# Altium PCB AIRZAI_LED_STRIP_FLEX_REVA_10mmPitch.PcbDoc
Units mil, origin at the board's own origin, x right, y up, seen from the top; angles counter-clockwise.
Board outline 6238.19 x 814.96 mil, 2 copper layers (Top Layer, Bottom Layer); 31 components, 32 nets, 158 pads, 34 vias.
Unrouted connection lines stored in the file: 53.
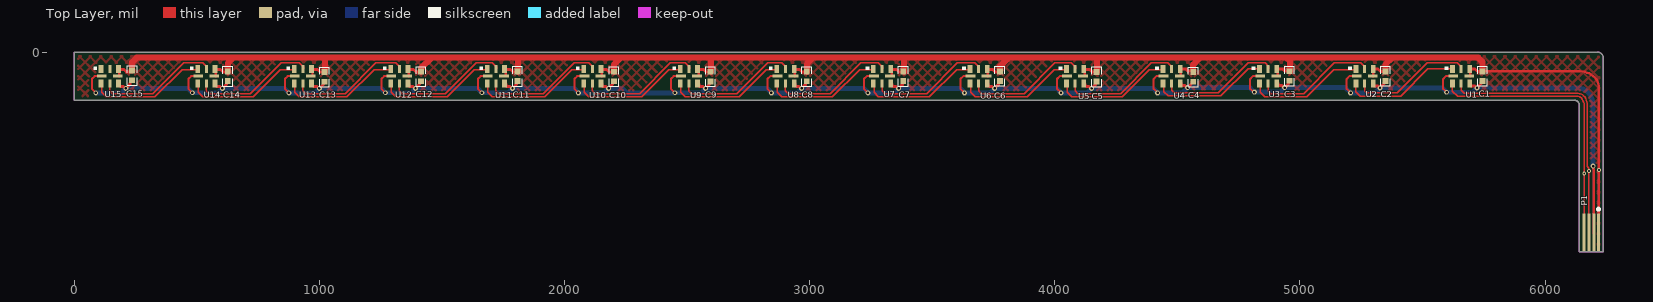
[diagram p0: Top Layer view]
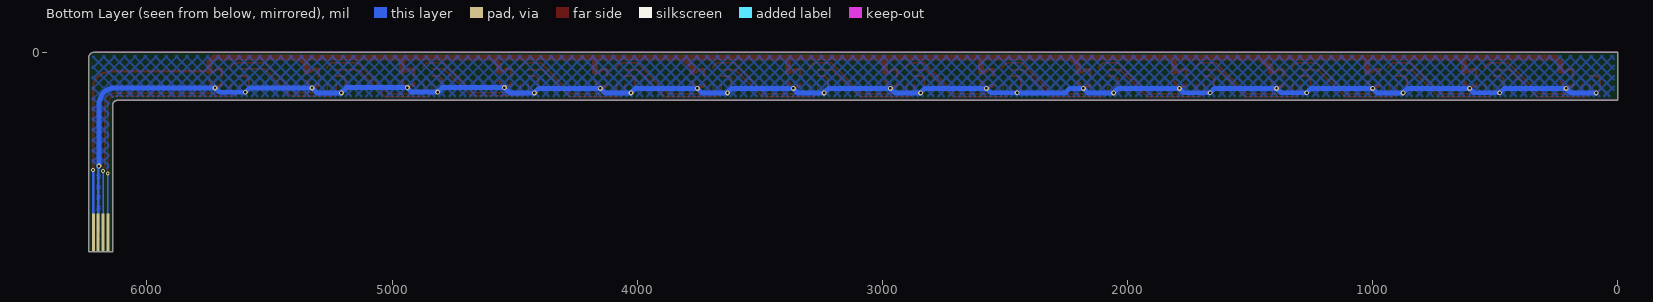
[diagram p1: Bottom Layer view, seen from below]

## Layer stack, top to bottom
Top Solder: solder mask 0.4, Solder Resist, Dk 3.5
Top Layer: signal copper 1.4
Dielectric 1: dielectric 12.6, FR-4, Dk 4.8
Bottom Layer: signal copper 1.4
Bottom Solder: solder mask 0.4, Solder Resist, Dk 3.5

## Board outline
0,-196.85 0,0 6213.15,0 cw(c6213.15,-25.04) 6238.19,-25.04 6238.19,-814.96 6139.76,-814.96 6139.76,-216.54 ccw(c6120.08,-216.54) 6120.08,-196.85
board region "Layer Stack Region 1": 6238.19,-554.85 6238.19,-814.96 6139.76,-814.96 6139.76,-554.85
board region "Layer Stack Region 1": 6139.76,-522.85 6139.76,-216.54 6139.39,-212.7 6136.45,-205.6 6131.01,-200.17 6123.92,-197.23 6120.08,-196.85 0,-196.85 0,0 6213.15,0 6218.13,0 6227.33,-3.81 6234.38,-10.86 6238.19,-20.06 6238.19,-25.04 6238.19,-522.85
board region "Layer Stack Region 2": 6139.76,-554.85 6139.76,-522.85 6238.19,-522.85 6238.19,-554.85

## Design rules (kind name [scope] priority, off if disabled: settings)
Clearance Clearance_polygon_5V [OnLayer('Keep-Out Layer') vs (InNet('+5V') AND InPolygon)] p1: gap=10 ignorepadtopadclearanceinfootprint=FALSE
Clearance Clearance_POLYGON_KEEPOUT [(OnLayer('Keep-Out Layer')) vs (InNet('GND') AND InPolygon)] p2: gap=10 ignorepadtopadclearanceinfootprint=FALSE
Clearance [All] p3: gap=6 ignorepadtopadclearanceinfootprint=FALSE
MinimumSolderMaskSliver [All] p1: minsoldermaskwidth=1
PolygonConnect [All] p1: connectstyle=Direct reliefconductorwidth=10 reliefentries=4 polygonreliefangle="90 Angle" airgapwidth=10
RoomDefinition AIRZAI_LED_STRIP_FLEX_REVA_10mmPitch [InComponentClass('AIRZAI_LED_STRIP_FLEX_REVA_10mmPitch')] p1: confinementstyle=ConfineIn formatcopy=TRUE lockcomponents=FALSE outline -4184.14,-5323.29 10475.86,-5323.29 10475.86,4276.71 -4184.14,4276.71
RoutingVias [All] p1: holewidth=28 width=50 viastyle="Through Hole" minholewidth=8 minwidth=16 maxholewidth=28 maxwidth=50
SilkToSilkClearance [All] p1: silktosilkclearance=1
SilkToSolderMaskClearance [IsPad] p1: minsilkscreentomaskgap=2 clearancetoexposedcopper=TRUE
SolderMaskExpansion [All] p1: expansion=4
UnRoutedNet [All] p1: checkbadconnections=TRUE
Width [All] p1: maxlimit=100 minlimit=6 preferedwidth=10
26 further rules are at their usual default settings.

## Components (designator, comment, footprint, x,y, rotation, side; value= is the part's Value field where it differs from the comment)
C1 "0.1µF" 0402CAP 5744.7,-98.42 r270 top
C2 "0.1µF" 0402CAP 5349.17,-98.42 r270 top
C3 "0.1µF" 0402CAP 4957.3,-97.74 r270 top
C4 "0.1µF" 0402CAP 4565.09,-101.43 r270 top
C5 "0.1µF" 0402CAP 4170.9,-100.74 r270 top
C6 "0.1µF" 0402CAP 3776.2,-98.42 r270 top
C7 "0.1µF" 0402CAP 3382.5,-98.74 r270 top
C8 "0.1µF" 0402CAP 2988.8,-99.39 r270 top
C9 "0.1µF" 0402CAP 2596.1,-99.92 r270 top
C10 "0.1µF" 0402CAP 2202.39,-99.74 r270 top
C11 "0.1µF" 0402CAP 1808.37,-98.74 r270 top
C12 "0.1µF" 0402CAP 1414.99,-99.24 r270 top
C13 "0.1µF" 0402CAP 1021.29,-101.43 r270 top
C14 "0.1µF" 0402CAP 627.02,-98.74 r270 top
C15 "0.1µF" 0402CAP 236.89,-95.34 r270 top
P1 "Header 4" FFC_4PADS 6188.98,-736.24 r0 top
U1 "APA102-2020-256-8" APA102–2020 5657.7,-98.42 r270 top
U2 "APA102-2020-256-8" APA102–2020 5264,-98.42 r270 top
U3 "APA102-2020-256-8" APA102–2020 4870.3,-98.43 r270 top
U4 "APA102-2020-256-8" APA102–2020 4476.6,-98.43 r270 top
U5 "APA102-2020-256-8" APA102–2020 4082.9,-98.42 r270 top
U6 "APA102-2020-256-8" APA102–2020 3689.2,-98.42 r270 top
U7 "APA102-2020-256-8" APA102–2020 3295.5,-98.42 r270 top
U8 "APA102-2020-256-8" APA102–2020 2901.8,-98.42 r270 top
U9 "APA102-2020-256-8" APA102–2020 2508.1,-98.42 r270 top
U10 "APA102-2020-256-8" APA102–2020 2114.39,-98.43 r270 top
U11 "APA102-2020-256-8" APA102–2020 1720.69,-98.42 r270 top
U12 "APA102-2020-256-8" APA102–2020 1326.99,-98.42 r270 top
U13 "APA102-2020-256-8" APA102–2020 933.29,-98.42 r270 top
U14 "APA102-2020-256-8" APA102–2020 539.59,-98.42 r270 top
U15 "APA102-2020-256-8" APA102–2020 145.89,-98.43 r270 top

## Footprints (in the part's own frame and the unit in brackets; to place one, negate y for a bottom-side part, rotate by r counter-clockwise, add the part's x,y. Pads: shape width x height; smd on the part's side, far side on the other; paste and mask are expansions set on the pad)
0402CAP [mm] "Chip Capacitor, Body 1.1x0.5mm, IPC High Density"
  rect 0.6x0.6 smd: 1(-0.5,0) 2(0.5,0)
  silkscreen extent -1.02,-0.51 1.02,0.51, body extent -0.5,-0.3 0.5,0.3, height 0.19
APA102–2020 [mm]
  rect 0.8x0.5 smd: 1(-0.75,0.9) 3(-0.75,-0.9) 4(0.75,-0.9) 6(0.75,0.9)
  rect 0.8x0.3 smd: 2(-0.75,0) 5(0.75,0)
  rect 0.3x1 smd: 7(0,-0.83) 8(0,0.83)
  silkscreen extent -1.02,-1.7 -0.63,-1.32, body extent -1,-1 1,1, height 0.94
FFC_4PADS [mm] "(0.50mm"
  rect 0.3x4 smd: 1(0.75,0) 2(0.25,0) 3(-0.25,0) 4(-0.75,0)
  rect 0.3x4 smd far side: 1(0.75,0) 2(0.25,0) 3(-0.25,0) 4(-0.75,0)
  silkscreen extent 0.62,2.3 0.87,2.55

## Part data
C1 C2 C3 C4 C5 C6 C7 C8 C9 C10 C11 C12 C13 C14 C15: library part C0402-100n, "Capacitor, X7R, ±10%", Case-EIA=0402, Case-Metric=1005, Manufacturer=TDK, Manufacturer Part Number=C1005X7R1C104K, Rated Voltage="16 V", Supplier Part Number 1=445-4952-2-ND, Tolerance=±20%, Max Thickness="0.6 mm", Note="16V ±10% X7R", Pin Count=2, Supplier 1=Digi-Key, Technology=SMT
P1: "Header, 4-Pin", LatestRevisionDate=17-Jul-2002, LatestRevisionNote="Re-released for DXP Platform.", Publisher="Altium Limited"
U1 U2 U3 U4 U5 U6 U7 U8 U9 U10 U11 U12 U13 U14 U15: "DotStar Micro LEDs", Package="SOIC-20 Adafruit Industries", Availability=Unavailable, MF="Adafruit Industries", MP=APA-102-2020-256-8, Price=None, SnapEDA_Link=https://www.snapeda.com/parts/APA-102-2020-256-8/APA%20Electronic%20/view-part/?ref=snap

## Via types
v1: diameter 20, hole 10, Top Layer to Bottom Layer, tented both sides, 31 vias
v2: diameter 16, hole 8, Top Layer to Bottom Layer, tented both sides, 3 vias

## Nets (pads, with @x,y where several pads share a name; then routed paths per layer and width w, separated by ;. In a path a pad name is that pad's centre, name@x,y a point inside that pad or via, vN(x,y) a via of type N, cw(c..) or ccw(c..) an arc to the next point about the centre after c; other vN are vias at no path point)
+5V: C1.1 C2.1 C3.1 C4.1 C5.1 C6.1 C7.1 C8.1 C9.1 C10.1 C11.1 C12.1 C13.1 C14.1 C15.1 P1.1 U1.1 U1.8 U2.1 U2.8 U3.1 U3.8 U4.1 U4.8 U5.1 U5.8 U6.1 U6.8 U7.1 U7.8 U8.1 U8.8 U9.1 U9.8 U10.1 U10.8 U11.1 U11.8 U12.1 U12.8 U13.1 U13.8 U14.1 U14.8 U15.1 U15.8 | length 9264
  Top Layer w10: U15.8@184.11,-98.43 U15.1@184.11,-71.21 ; U14.8@577.81,-98.42 U14.1@577.81,-71.21 ; U13.8@972.65,-96.85 U13.1@972.65,-71.21 ; U12.8@1365.27,-98.42 U12.1@1365.27,-71.2 ; U11.8@1760.05,-96.85 U11.1@1760.05,-71.21 ; U10.8@2152.67,-98.42 U10.1@2152.67,-71.21 ; U9.8@2547.45,-96.85 U9.1@2547.45,-71.21 ; U8.8@2940.07,-98.42 U8.1@2940.07,-71.21 ; U7.8@3334.85,-96.85 U7.1@3334.85,-71.21 ; U6.8@3727.48,-98.42 U6.1@3727.48,-71.21 ; U5.8@4122.25,-96.85 U5.1@4122.25,-71.21 ; U4.8@4512.12,-97.74 4513.97,-97.74 4514.88,-96.83 U4.1@4514.88,-68.21 ; U3.8@4909.66,-97.74 4910.56,-96.83 U3.1@4910.56,-68.21 ; U2.8 5298.53,-98.42 5299.43,-97.52 U2.1 ; U1.8@5694.06,-98.42 5694.97,-97.52 U1.1@5694.97,-68.9 ; C1.1 6142.14,-78.74 cw(c6142.14,-164.47) 6202.76,-103.85 cw(c6161.72,-144.89) 6219.76,-144.89 v2(6219.76,-480.85) 6218.62,-482 6218.62,-486.24 6218.5,-486.35 P1.1@6218.5,-736.24
  Top Layer w12: U15.1@184.11,-71.21 203.76,-71.21 213.6,-81.05 C15.1@233.84,-81.05 ; U14.1@577.81,-71.21 597.46,-71.21 607.3,-81.05 C14.1@627.55,-81.05 ; U13.1@972.65,-71.21 993.2,-71.21 1003.04,-81.05 C13.1@1023.29,-81.05 ; U12.1@1365.27,-71.2 1384.92,-71.2 1394.76,-81.05 C12.1@1415,-81.05 ; U11.1@1760.05,-71.21 1780.6,-71.21 1790.44,-81.05 C11.1@1810.69,-81.05 ; U10.1@2152.67,-71.21 2172.32,-71.21 2182.16,-81.05 C10.1@2202.4,-81.05 ; U9.1@2547.45,-71.21 2568,-71.21 2577.84,-81.05 C9.1@2598.09,-81.05 ; U8.1@2940.07,-71.21 2959.72,-71.21 2969.56,-81.05 C8.1@2989.81,-81.05 ; U7.1@3334.85,-71.21 3355.4,-71.21 3365.25,-81.05 C7.1@3385.49,-81.05 ; U6.1@3727.48,-71.21 3747.12,-71.21 3756.96,-81.05 C6.1@3777.21,-81.05 ; U5.1@4122.25,-71.21 4142.81,-71.21 4152.65,-81.05 C5.1@4172.89,-81.05 ; U4.1@4514.88,-68.21 4534.52,-68.21 4544.36,-78.05 C4.1@4564.61,-78.05 ; U3.1@4910.56,-68.21 4930.21,-68.21 4940.05,-78.05 C3.1@4960.29,-78.05 ; U2.1 5319.08,-68.9 5328.92,-78.74 C2.1 ; U1.1@5694.97,-68.9 5714.62,-68.9 5724.46,-78.74 C1.1
  Top Layer w25: C15.1 236.89,-41.61 255.86,-22.65 649.56,-22.65 ; C14.1@627.55,-81.05 627.55,-44.66 649.56,-22.65 ; 899.26,-22.65 1021.06,-22.65 1023.29,-24.88 C13.1@1023.29,-81.05 ; C12.1@1415,-81.05 1415,-66.85 1459.21,-22.65 ; C11.1@1810.69,-81.05 1810.69,-29.85 1803.49,-22.65 ; C10.1@2202.4,-81.05 2202.4,-50.68 2230.44,-22.65 ; C9.1@2598.09,-81.05 2598.09,-22.65 ; C8.1@2989.81,-81.05 2989.81,-46.56 3013.71,-22.65 ; C7.1@3385.49,-81.05 3385.49,-27.98 3380.16,-22.65 3298.49,-22.65 ; C6.1@3777.21,-81.05 3777.21,-57.86 3812.41,-22.65 ; C5.1@4172.89,-81.05 4172.89,-22.65 4136.06,-22.65 ; C4.1@4564.61,-78.05 4564.61,-51.08 4588.48,-27.21 ; 4944.55,-22.65 4960.29,-38.4 C3.1@4960.29,-78.05 ; C2.1 5349.17,-50.63 5376.36,-23.44 ; C1.1 5744.7,-39.09 5728.26,-22.65 4136.06,-22.65 ; 649.56,-22.65 1459.21,-22.65 ; 1459.21,-22.65 1803.49,-22.65 ; 1803.49,-22.65 2598.09,-22.65 ; 2598.09,-22.65 3298.49,-22.65 ; 3298.49,-22.65 4136.06,-22.65
  Bottom Layer w10: P1.1@6218.5,-736.24 6218.5,-486.35 6218.62,-486.24 6218.62,-482.22 6218.5,-482.11 v2(6219.76,-480.85)
GND: C1.2 C2.2 C3.2 C4.2 C5.2 C6.2 C7.2 C8.2 C9.2 C10.2 C11.2 C12.2 C13.2 C14.2 C15.2 P1.2 U1.6 U1.7 U2.6 U2.7 U3.6 U3.7 U4.6 U4.7 U5.6 U5.7 U6.6 U6.7 U7.6 U7.7 U8.6 U8.7 U9.6 U9.7 U10.6 U10.7 U11.6 U11.7 U12.6 U12.7 U13.6 U13.7 U14.6 U14.7 U15.6 U15.7 | length 9913.9
  Top Layer w8: v1(88.65,-166.16) 72.26,-149.77 72.26,-109.85 83.68,-98.43 U15.7 ; v1(482.35,-166.16) 465.96,-149.77 465.96,-109.85 477.39,-98.42 U14.7 ; v1(876.05,-166.16) 859.66,-149.77 859.66,-109.85 871.09,-98.42 U13.7 ; v1(1269.75,-166.16) 1253.36,-149.77 1253.36,-109.85 1264.79,-98.42 U12.7 ; v1(1663.45,-166.16) 1647.06,-149.77 1647.06,-109.85 1658.49,-98.42 U11.7 ; v1(2057.15,-166.16) 2040.76,-149.77 2040.76,-109.85 2052.19,-98.43 U10.7 ; v1(2450.85,-166.16) 2434.47,-149.77 2434.47,-109.85 2445.89,-98.42 U9.7 ; v1(2844.55,-166.16) 2828.17,-149.77 2828.17,-109.85 2839.59,-98.42 U8.7 ; v1(3238.25,-166.16) 3221.87,-149.77 3221.87,-109.85 3233.29,-98.42 U7.7 ; v1(3631.96,-166.16) 3615.57,-149.77 3615.57,-109.85 3626.99,-98.42 U6.7 ; v1(4025.66,-166.16) 4009.27,-149.77 4009.27,-109.85 4020.69,-98.42 U5.7 ; v1(4419.36,-166.16) 4402.97,-149.77 4402.97,-109.85 4414.39,-98.43 U4.7 ; v1@4813.06,-166.16 4796.67,-149.77 4796.67,-109.85 4808.09,-98.43 U3.7 ; v1(5206.76,-166.16) 5190.37,-149.77 5190.37,-109.85 5201.8,-98.42 U2.7 ; v1@5600.46,-166.16 5584.07,-149.77 5584.07,-109.85 5595.5,-98.42 U1.7
  Top Layer w10: v1@6197.68,-466.76 v1(6195.76,-464.85) 6195.76,-474.85 6198.82,-477.91 P1.2@6198.82,-736.24
  Top Layer w12: U15.6@184.11,-130.26 184.11,-136.17 187.95,-140.01 201.13,-140.01 209.28,-148.16 v1(211.44,-148.16) 228.03,-131.57 228.03,-126.23 C15.2@233.84,-120.42 ; U14.6@577.81,-130.26 577.81,-136.17 581.66,-140.01 594.83,-140.01 602.98,-148.16 v1(605.14,-148.16) 621.73,-131.57 621.73,-126.23 C14.2@627.55,-120.42 ; U13.6@973.55,-130.26 973.55,-136.17 977.4,-140.01 990.57,-140.01 998.72,-148.16 v1(1000.88,-148.16) 1017.47,-131.57 1017.47,-126.23 C13.2@1023.29,-120.42 ; U12.6@1365.27,-130.26 1365.27,-136.17 1369.11,-140.01 1382.29,-140.01 1390.44,-148.16 v1(1392.6,-148.16) 1409.19,-131.57 1409.19,-126.23 C12.2@1415,-120.42 ; U11.6@1760.96,-130.26 1760.96,-136.17 1764.8,-140.01 1777.97,-140.01 1786.12,-148.16 v1(1788.29,-148.16) 1804.88,-131.57 1804.88,-126.23 C11.2@1810.69,-120.42 ; U10.6@2152.67,-130.26 2152.67,-136.17 2156.51,-140.01 2169.69,-140.01 2177.84,-148.16 v1(2180,-148.16) 2196.59,-131.57 2196.59,-126.23 C10.2@2202.4,-120.42 ; U9.6@2548.36,-130.26 2548.36,-136.17 2552.2,-140.01 2565.37,-140.01 2573.52,-148.16 v1(2575.69,-148.16) 2592.28,-131.57 2592.28,-126.23 C9.2@2598.09,-120.42 ; U8.6@2940.07,-130.26 2940.07,-136.17 2943.92,-140.01 2957.09,-140.01 2965.24,-148.16 v1(2967.4,-148.16) 2983.99,-131.57 2983.99,-126.23 C8.2@2989.81,-120.42 ; U7.6@3335.76,-130.26 3335.76,-136.17 3339.6,-140.01 3352.77,-140.01 3360.92,-148.16 v1(3363.09,-148.16) 3379.68,-131.57 3379.68,-126.23 C7.2@3385.49,-120.42 ; U6.6@3727.48,-130.26 3727.48,-136.17 3731.32,-140.01 3744.49,-140.01 3752.64,-148.16 v1(3754.81,-148.16) 3771.4,-131.57 3771.4,-126.23 C6.2@3777.21,-120.42 ; U5.6@4123.16,-130.26 4123.16,-136.17 4127,-140.01 4140.18,-140.01 4148.33,-148.16 v1(4150.49,-148.16) 4167.08,-131.57 4167.08,-126.23 C5.2@4172.89,-120.42 ; U4.6@4514.88,-127.26 4514.88,-133.17 4518.72,-137.01 4531.89,-137.01 4540.04,-145.16 v1(4542.21,-145.16) 4558.8,-128.57 4558.8,-123.23 C4.2@4564.61,-117.42 ; U3.6@4910.56,-127.26 4910.56,-133.17 4914.4,-137.01 4927.58,-137.01 4935.73,-145.16 v1(4937.89,-145.16) 4954.48,-128.57 4954.48,-123.23 C3.2@4960.29,-117.42 ; U2.6 5299.43,-133.86 5303.28,-137.7 5316.45,-137.7 5324.6,-145.85 v1(5326.76,-145.85) 5343.36,-129.26 5343.36,-123.92 C2.2 ; U1.6@5694.97,-127.95 5694.97,-133.86 5698.81,-137.7 5711.99,-137.7 5720.14,-145.85 v1(5722.3,-145.85) 5738.89,-129.26 5738.89,-123.92 C1.2
  Bottom Layer w10: P1.2@6198.82,-736.24 6198.82,-474.98
  Bottom Layer w20: v1(88.65,-166.16) 193.44,-166.16 v1(211.44,-148.16) 425.76,-148.16 464.35,-148.16 v1(482.35,-166.16) 587.14,-166.16 v1(605.14,-148.16) 858.05,-148.16 v1(876.05,-166.16) 982.88,-166.16 v1(1000.88,-148.16) 1251.75,-148.16 v1(1269.75,-166.16) 1374.6,-166.16 v1(1392.6,-148.16) 1645.45,-148.16 v1(1663.45,-166.16) 1770.29,-166.16 v1(1788.29,-148.16) 2039.15,-148.16 v1(2057.15,-166.16) 2162,-166.16 v1(2180,-148.16) 2236,-148.16 2254,-166.16 v1(2450.85,-166.16) 2557.69,-166.16 v1(2575.69,-148.16) 2826.55,-148.16 v1(2844.55,-166.16) 2949.4,-166.16 v1(2967.4,-148.16) 3220.25,-148.16 v1(3238.25,-166.16) 3345.09,-166.16 v1(3363.09,-148.16) 3613.96,-148.16 v1(3631.96,-166.16) 3736.81,-166.16 v1(3754.81,-148.16) 4007.66,-148.16 v1(4025.66,-166.16) 4132.49,-166.16 v1(4150.49,-148.16) 4401.36,-148.16 v1(4419.36,-166.16) 4521.21,-166.16 v1(4542.21,-145.16) 4796.06,-145.16 v1(4814.06,-163.16) 4919.89,-163.16 v1(4937.89,-145.16) 5185.76,-145.16 v1(5206.76,-166.16) 5306.45,-166.16 v1(5326.76,-145.85) 5580.47,-145.85 v1(5598.47,-163.85) 5704.3,-163.85 v1(5722.3,-145.85) 6132.72,-145.85 cw(c6132.72,-203.89) 6173.76,-162.85 cw(c6120.65,-215.96) 6195.76,-215.96 v1(6195.76,-464.85)
LED_CLK_IN: P1.3 U1.5 | length 1350.6
  Top Layer w6: U1.5 5657.7,-156.09 5670.47,-168.85 6135.04,-168.85 cw(c6135.04,-199.58) 6156.76,-177.85 cw(c6118.14,-216.48) 6172.76,-216.48 6172.76,-463.19 ccw(c6186.42,-463.19) 6176.76,-472.85 cw(c6171.04,-478.57) 6179.13,-478.57 v2(6179.13,-484.85) P1.3@6179.13,-736.24
  Bottom Layer w6: P1.3@6179.13,-736.24 v2(6179.13,-484.85)
LED_CLK_OUT1: U1.2 U2.5 | length 494.1
  Top Layer w6: U2.5 5264,-158.7 5272.15,-166.85 5397.76,-166.85 5520.46,-44.15 5641.76,-44.15 5657.7,-60.09 U1.2
LED_CLK_OUT2: U2.2 U3.5 | length 497.5
  Top Layer w6: U3.5@4870.15,-127.95 4870.15,-158.17 4881.14,-169.16 5014.83,-169.16 5139.85,-44.15 5231.56,-44.15 5248.75,-44.15 5266.99,-62.4 U2.2@5266.99,-68.9
LED_CLK_OUT3: U3.2 U4.5 | length 494.1
  Top Layer w6: U4.5 4476.6,-155.17 4487.59,-166.16 4667.87,-166.16 4789.88,-44.15 4858.05,-44.15 4873.29,-59.4 U3.2@4873.29,-68.21
LED_CLK_OUT4: U4.2 U5.5 | length 497.3
  Top Layer w6: U5.5 4082.9,-158.17 4093.89,-169.16 4268.45,-169.16 4393.46,-44.15 4461.34,-44.15 4479.59,-62.4 U4.2@4479.59,-68.9
LED_CLK_OUT5: U5.2 U6.5 | length 497.3
  Top Layer w6: U6.5 3689.2,-158.17 3700.19,-169.16 3875.03,-169.16 4000.04,-44.15 4067.65,-44.15 4085.89,-62.4 U5.2@4085.89,-68.9
LED_CLK_OUT6: U6.2 U7.5 | length 497.3
  Top Layer w6: U7.5 3295.5,-158.17 3306.49,-169.16 3477.87,-169.16 3602.88,-44.15 3673.94,-44.15 3692.19,-62.4 U6.2@3692.19,-68.9
LED_CLK_OUT7: U7.2 U8.5 | length 497.3
  Top Layer w6: U8.5 2901.8,-158.17 2912.79,-169.16 3083.45,-169.16 3208.47,-44.15 3280.24,-44.15 3298.49,-62.4 U7.2@3298.49,-68.9
LED_CLK_OUT8: U8.2 U9.5 | length 497.3
  Top Layer w6: U9.5 2508.09,-158.17 2519.09,-169.16 2703.45,-169.16 2828.47,-44.15 2886.54,-44.15 2904.79,-62.4 U8.2@2904.79,-68.9
LED_CLK_OUT9: U9.2 U10.5 | length 497.3
  Top Layer w6: U10.5 2114.4,-158.17 2125.39,-169.16 2307.45,-169.16 2432.47,-44.15 2492.84,-44.15 2511.09,-62.4 U9.2@2511.09,-68.9
LED_CLK_OUT10: U10.2 U11.5 | length 497.3
  Top Layer w6: U11.5 1720.69,-158.17 1731.69,-169.16 1914.46,-169.16 2039.47,-44.15 2099.14,-44.15 2117.39,-62.4 U10.2@2117.39,-68.9
LED_CLK_OUT11: U11.2 U12.5 | length 497.3
  Top Layer w6: U12.5 1326.99,-158.16 1337.99,-169.16 1514.46,-169.16 1639.47,-44.15 1705.44,-44.15 1723.69,-62.4 U11.2@1723.69,-68.9
LED_CLK_OUT12: U12.2 U13.5 | length 497.3
  Top Layer w6: U13.5 933.29,-158.17 944.28,-169.16 1105.36,-169.16 1230.37,-44.15 1291.76,-44.15 1311.74,-44.15 1329.99,-62.39 U12.2@1329.99,-68.9
LED_CLK_OUT13: U13.2 U14.5 | length 497.4
  Top Layer w6: U14.5 539.54,-158.16 550.53,-169.16 719.46,-169.16 844.47,-44.15 918.04,-44.15 936.29,-62.4 U13.2@936.29,-68.9
LED_CLK_OUT14: U14.2 U15.5 | length 497.4
  Top Layer w6: U15.5 145.83,-158.17 156.83,-169.16 321.45,-169.16 446.47,-44.15 487.36,-44.15 524.34,-44.15 542.59,-62.39 U14.2@542.59,-68.9
LED_SDI: P1.4 U1.4 | length 1359.9
  Top Layer w6: U1.4 5622.27,-159.65 5643.47,-180.85 6132.28,-180.85 cw(c6132.28,-201.34) 6146.76,-186.85 cw(c6116.14,-217.47) 6159.45,-217.47 P1.4@6159.45,-736.24
  Bottom Layer w6: P1.4@6159.45,-736.24 6159.76,-735.92 v2(6159.76,-495.85)
LED_SDO_1: U1.3 U2.4 | length 480.9
  Top Layer w6: U2.4 5228.57,-161.65 5246.76,-179.85 5410.76,-179.85 5521.72,-68.9 U1.3
LED_SDO_2: U2.3 U3.4 | length 481.2
  Top Layer w6: U3.4@4837.56,-130.26 4837.56,-163.96 4855.76,-182.16 5027.45,-182.16 5138.41,-71.21 U2.3@5231.56,-71.21
LED_SDO_3: U3.3 U4.4 | length 481
  Top Layer w6: U4.4@4444.01,-127.26 4444.01,-160.96 4462.21,-179.16 4677.45,-179.16 4788.41,-68.21 U3.3@4837.86,-68.21
LED_SDO_4: U4.3 U5.4 | length 481
  Top Layer w6: U5.4@4050.31,-130.26 4050.31,-163.96 4068.51,-182.16 4275.3,-182.16 4386.26,-71.21 U4.3@4444.16,-71.21
LED_SDO_5: U5.3 U6.4 | length 481
  Top Layer w6: U6.4@3656.61,-130.26 3656.61,-163.96 3674.81,-182.16 3887.45,-182.16 3998.41,-71.21 U5.3@4050.46,-71.21
LED_SDO_6: U6.3 U7.4 | length 481
  Top Layer w6: U7.4@3262.91,-130.26 3262.91,-163.96 3281.1,-182.16 3488.45,-182.16 3599.41,-71.21 U6.3@3656.76,-71.21
LED_SDO_7: U7.3 U8.4 | length 481
  Top Layer w6: U8.4@2869.21,-130.26 2869.21,-163.96 2887.4,-182.16 3093.45,-182.16 3204.41,-71.21 U7.3@3263.06,-71.21
LED_SDO_8: U8.3 U9.4 | length 481
  Top Layer w6: U9.4@2475.5,-130.26 2475.5,-163.96 2493.7,-182.16 2712.45,-182.16 2823.41,-71.21 U8.3@2869.36,-71.21
LED_SDO_9: U9.3 U10.4 | length 481
  Top Layer w6: U10.4@2081.81,-130.26 2081.81,-163.96 2100,-182.16 2315.45,-182.16 2426.41,-71.21 U9.3@2475.66,-71.21
LED_SDO_10: U10.3 U11.4 | length 481
  Top Layer w6: U11.4@1688.11,-130.26 1688.11,-163.96 1706.3,-182.16 1919.46,-182.16 2030.41,-71.21 U10.3@2081.96,-71.21
LED_SDO_11: U11.3 U12.4 | length 481
  Top Layer w6: U12.4@1294.4,-130.26 1294.4,-163.96 1312.6,-182.16 1521.46,-182.16 1632.41,-71.21 U11.3@1688.25,-71.21
LED_SDO_12: U12.3 U13.4 | length 481
  Top Layer w6: U13.4@900.7,-130.26 900.7,-163.96 918.9,-182.16 1113.03,-182.16 1223.98,-71.2 U12.3@1294.55,-71.2
LED_SDO_13: U13.3 U14.4 | length 481.1
  Top Layer w6: U14.4@506.95,-130.26 506.95,-163.96 525.14,-182.16 730.46,-182.16 841.41,-71.21 U13.3@900.85,-71.21
LED_SDO_14: U14.3 U15.4 | length 481.1
  Top Layer w6: U15.4@113.25,-130.26 113.25,-163.96 131.44,-182.16 329.76,-182.16 440.72,-71.21 U14.3@507.15,-71.21
pads on no net: U15.2 U15.3

## Polygon pours and split planes (outlines as drawn)
GND on Bottom Layer "gnd_bot" (hatched 45Degree grid 30 track 9.5, remove dead copper, pour order 0): 0,-196.85 0,0 6213.15,0 cw(c6213.15,-25.04) 6238.19,-25.04 6238.19,-814.96 6139.76,-814.96 6139.76,-216.54 ccw(c6120.08,-216.54) 6120.08,-196.85
+5V on Top Layer "Top Layer-+5V" (hatched 45Degree grid 30 track 9.5, remove dead copper, pour order 1): 0,-196.85 0,0 6213.15,0 cw(c6213.15,-25.04) 6238.19,-25.04 6238.19,-814.96 6139.76,-814.96 6139.76,-216.54 ccw(c6120.08,-216.54) 6120.08,-196.85

## Keep-outs
Keep-Out Layer:
  lines w5: 6120.08,-196.85 cw(c6120.08,-216.54) 6139.76,-216.54 6139.76,-814.96 6238.19,-814.96 6238.19,-25.04 ccw(c6213.15,-25.04) 6213.15,0 6139.76,0 5805.12,0 0,0 0,-196.85 6120.08,-196.85 ; 6120.08,-196.85 6120.08,-196.85

## Other copper
Top Layer:
  pour cut-out: 88.15,-44.15 88.45,-43.85 213.45,-43.85 213.45,-157.85 213.13,-158.17 88.45,-158.17 88.45,-44.45
  pour cut-out: 875.76,-44.15 876.06,-43.85 1001.06,-43.85 1001.06,-157.85 1000.74,-158.17 876.06,-158.17 876.06,-44.45
  pour cut-out: 481.85,-44.15 482.15,-43.85 607.15,-43.85 607.15,-157.85 606.83,-158.16 482.15,-158.16 482.15,-44.45
  pour cut-out: 2450.56,-44.15 2450.86,-43.85 2575.86,-43.85 2575.86,-157.85 2575.54,-158.17 2450.86,-158.17 2450.86,-44.45
  pour cut-out: 2056.71,-44.15 2057.01,-43.85 2182.01,-43.85 2182.01,-157.85 2181.69,-158.17 2057.01,-158.17 2057.01,-44.45
  pour cut-out: 1269.46,-44.15 1269.76,-43.85 1394.76,-43.85 1394.76,-157.85 1394.44,-158.16 1269.76,-158.16 1269.76,-44.45
  pour cut-out: 1663.31,-44.15 1663.61,-43.85 1788.61,-43.85 1788.61,-157.85 1788.29,-158.17 1663.61,-158.17 1663.61,-44.45
  pour cut-out: 4025.36,-44.15 4025.66,-43.85 4150.66,-43.85 4150.66,-157.85 4150.35,-158.17 4025.66,-158.17 4025.66,-44.45
  pour cut-out: 3631.51,-44.15 3631.81,-43.85 3756.81,-43.85 3756.81,-157.85 3756.5,-158.17 3631.81,-158.17 3631.81,-44.45
  pour cut-out: 2844.26,-44.15 2844.56,-43.85 2969.56,-43.85 2969.56,-157.85 2969.24,-158.17 2844.56,-158.17 2844.56,-44.45
  pour cut-out: 3238.11,-44.15 3238.41,-43.85 3363.41,-43.85 3363.41,-157.85 3363.09,-158.17 3238.41,-158.17 3238.41,-44.45
  pour cut-out: 4812.91,-44.15 4813.21,-43.85 4938.21,-43.85 4938.21,-157.85 4937.9,-158.17 4813.21,-158.17 4813.21,-44.45
  pour cut-out: 4419.06,-44.15 4419.36,-43.85 4544.36,-43.85 4544.36,-157.85 4544.05,-158.17 4419.36,-158.17 4419.36,-44.45
  pour cut-out: 5206.47,-44.15 5206.76,-43.85 5331.76,-43.85 5331.76,-157.85 5331.45,-158.17 5206.76,-158.17 5206.76,-44.45
  pour cut-out: 5600.17,-44.15 5600.47,-43.85 5725.47,-43.85 5725.47,-157.85 5725.15,-158.17 5600.47,-158.17 5600.47,-44.45

## Silkscreen, mask and mechanical layers (free items; w line width, h text height)
Mechanical 1:
  lines w5: 1,-98.85 cw(c1.43,-98.85) 1.43,-98.43 5805.12,-98.43 5805.12,0 ; 145.89,-107.93 145.89,-88.93 ; 539.59,-107.93 539.59,-88.93 ; 933.29,-107.93 933.29,-88.93 ; 1326.99,-107.93 1326.99,-88.93 ; 1720.69,-107.93 1720.69,-88.93 ; 2114.39,-107.93 2114.39,-88.93 ; 2508.09,-107.93 2508.09,-88.93 ; 2901.8,-107.93 2901.8,-88.93 ; 3295.5,-107.93 3295.5,-88.93 ; 3689.2,-107.93 3689.2,-88.93 ; 4082.9,-107.93 4082.9,-88.93 ; 4476.6,-107.93 4476.6,-88.93 ; 4870.3,-107.93 4870.3,-88.93 ; 5977.06,-539.37 6238.19,-539.37 ; 6139.76,-51.85 6139.76,0 ; 5264,-107.93 5264,-88.93 ; 5264,-107.93 5264,-88.93 ; 5264,-107.93 5264,-88.93 ; 5264,-107.93 5264,-88.93 ; 5264,-107.93 5264,-88.93 ; 5657.7,-107.93 5657.7,-88.93 ; 5657.7,-107.93 5657.7,-88.93 ; 5657.7,-107.93 5657.7,-88.93 ; 5657.7,-107.93 5657.7,-88.93 ; 5657.7,-107.93 5657.7,-88.93
Mechanical 4:
  lines w5: 6120.08,-196.85 cw(c6120.08,-216.54) 6139.76,-216.54 6139.76,-814.96 6238.19,-814.96 6238.19,-25.04 ccw(c6213.15,-25.04) 6213.15,0 6139.76,0 5805.12,0 0,0 0,-196.85 6120.08,-196.85 ; 6120.08,-196.85 6120.08,-196.85

## Dimensions
5805.12,125.15 to 6139.76,0 on Mechanical 1
0,0 to 5805.12,0 on Mechanical 1